# EAGLE board ZephMultiples-R2 (EAGLE 6.5.0)
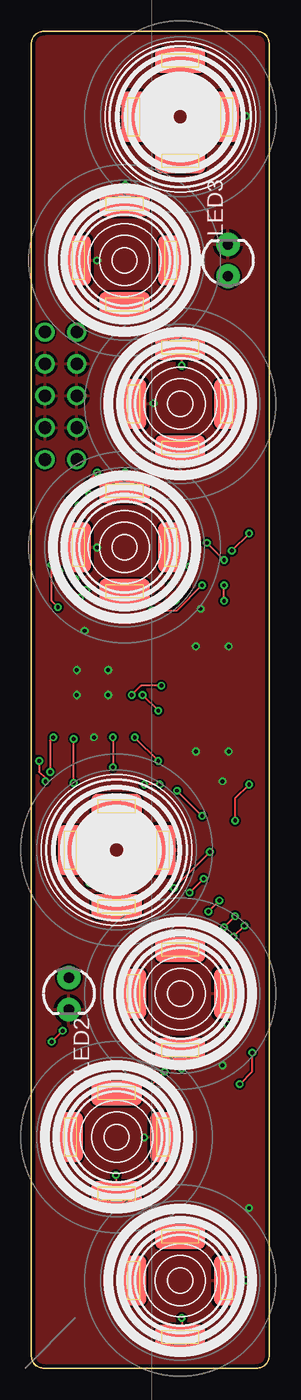
[diagram p0: board, top side]
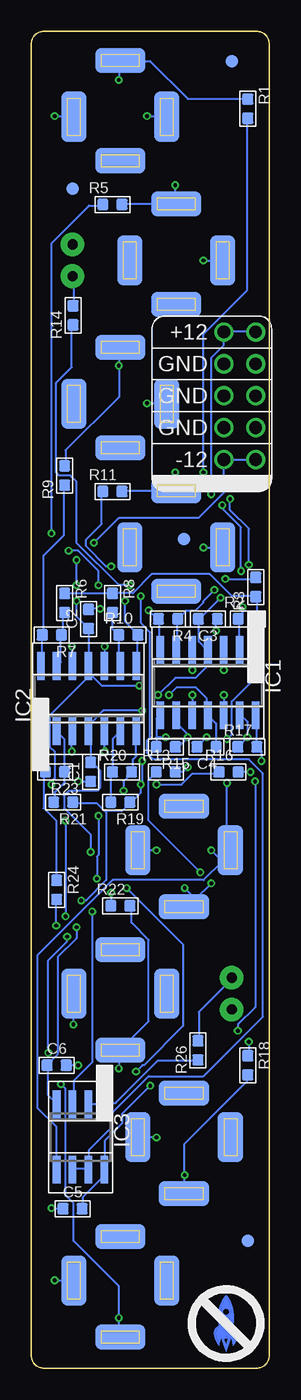
[diagram p1: board, bottom side, seen from below]

Size 18.98 x 106.5 mm. Coordinates in mm from the lower left corner, seen from the top.
Copper layers (1*16): Top 0.035mm / dielectric 1.5mm / Bottom 0.035mm
Design rules "ITEADstudio_DRC": minimum track width 6mil, minimum drill 12mil, track to track 6mil, track to pad 6mil, pad to pad 6mil, via to via 6mil, smd to smd 0mil, copper to edge 10mil, drill to drill 10mil, minimum pad ring 10mil, minimum via ring 6mil, stop-mask expansion 2mil, vias tented up to drill 100mil, thermal gap 10mil
Net classes: 1 AUDIO: width 1.016 mm

## Footprints (pad centres in the part's own frame; a part is rotated, then mirrored left to right if it is on the bottom)
C0603 = smd 0.889 x 0.889: 1 -0.762,0; 2 0.762,0
3.5MM-JACK-SWITCH-13MM-INPUT = smd 2 x 4: RING@1 -3.7,0; SWITCH@1 3.7,0 | smd 2 x 4 bottom: RING@2 -3.7,0; SWITCH@2 3.7,0 | smd 4 x 2: SECOND@1 0,-3.5; TIP@1 0,4.5 | smd 4 x 2 bottom: SECOND@2 0,-3.5; TIP@2 0,4.5
SO14 = smd 0.6 x 2.2: 1 -3.81,-2.6; 2 -2.54,-2.6; 3 -1.27,-2.6; 4 0,-2.6; 5 1.27,-2.6; 6 2.54,-2.6; 7 3.81,-2.6; 8 3.81,2.6; 9 2.54,2.6; 10 1.27,2.6; 11 0,2.6; 12 -1.27,2.6; 13 -2.54,2.6; 14 -3.81,2.6
SO08 = smd 0.6 x 2.2: 1 -1.905,-2.6; 2 -0.635,-2.6; 3 0.635,-2.6; 4 1.905,-2.6; 5 1.905,2.6; 6 0.635,2.6; 7 -0.635,2.6; 8 -1.905,2.6
LED3MM = drill 0.813 pad 1.88: A -1.27,0; K 1.27,0
3.5MM-JACK-SWITCH-13MM-OUTPUT = smd 2 x 4: RING@1 -3.7,0; SWITCH@1 3.7,0 | smd 2 x 4 bottom: RING@2 -3.7,0; SWITCH@2 3.7,0 | smd 4 x 2: SECOND@1 0,-3.5; TIP@1 0,4.5 | smd 4 x 2 bottom: SECOND@2 0,-3.5; TIP@2 0,4.5
R0603 = smd 0.889 x 0.889: 1 -0.762,0; 2 0.762,0
FIDUCIAL_1MM = smd 1 x 1: 1 0,0
POWER_10_LABELSOTHERSIDE = drill 1.016: 1 -5.08,-1.27; 2 -5.08,1.27; 3 -2.54,-1.27; 4 -2.54,1.27; 5 0,-1.27; 6 0,1.27; 7 2.54,-1.27; 8 2.54,1.27; 9 5.08,-1.27; 10 5.08,1.27

## Placement (x,y rotation side)
C1  100n  [C0603]  14.25,47.5 90 bottom
C2  100n  [C0603]  14.42,59.69 90 bottom
C3  100n  [C0603]  4.89,59.69 180 bottom
C4  100n  [C0603]  5,49.5 180 bottom
C5  100n  [C0603]  15.69,12.7 0 bottom
C6  100n  [C0603]  16.96,24.13 0 bottom
I1  In 1  [3.5MM-JACK-SWITCH-13MM-INPUT]  11.88,99.69 0 top
I2  In 2  [3.5MM-JACK-SWITCH-13MM-INPUT]  6.8,41.27 180 top
IC1  TL074D  [SO14]  4.89,54.61 180 bottom
IC2  TL074D  [SO14]  14.42,53.34 0 bottom
IC3  TL072  [SO08]  15.05,18.41 180 bottom
LED2  REDBLUE  [LED3MM]  2.99,29.84 270 top
LED3  REDBLUE  [LED3MM]  15.69,88.27 90 top
O1-1  [3.5MM-JACK-SWITCH-13MM-OUTPUT]  7.44,88.27 0 top
O1-2  [3.5MM-JACK-SWITCH-13MM-OUTPUT]  11.88,76.83 0 top
O1-3  [3.5MM-JACK-SWITCH-13MM-OUTPUT]  7.44,65.41 0 top
O2-1  [3.5MM-JACK-SWITCH-13MM-OUTPUT]  6.8,18.41 180 top
O2-2  [3.5MM-JACK-SWITCH-13MM-OUTPUT]  11.88,29.84 180 top
O2-3  [3.5MM-JACK-SWITCH-13MM-OUTPUT]  11.88,6.99 180 top
R1  100k  [R0603]  1.72,100.33 270 bottom
R2  100k  [R0603]  1.72,59.69 0 bottom
R3  100k  [R0603]  1.09,62.23 90 bottom
R4  100k  [R0603]  8.07,59.69 180 bottom
R5  51  [R0603]  12.52,92.71 0 bottom
R6  100k  [R0603]  16.32,60.96 270 bottom
R7  100k  [R0603]  17.34,58.42 180 bottom
R8  100k  [R0603]  12.52,60.96 270 bottom
R9  51  [R0603]  16.32,71.12 90 bottom
R10  100k  [R0603]  11.24,58.42 0 bottom
R11  51  [R0603]  12.52,69.85 0 bottom
R13  100k  [R0603]  8.25,47.5 0 bottom
R14  1k  [R0603]  15.65,83.88 90 bottom
R15  100k  [R0603]  8.25,49.5 180 bottom
R16  100k  [R0603]  3.25,47.5 0 bottom
R17  100k  [R0603]  1.75,49.5 0 bottom
R18  51  [R0603]  1.72,24.13 270 bottom
R19  100k  [R0603]  11.88,45.09 180 bottom
R20  100k  [R0603]  11.75,47.5 0 bottom
R21  100k  [R0603]  16.44,45.09 180 bottom
R22  51  [R0603]  11.88,36.83 0 bottom
R23  100k  [R0603]  17.09,47.51 180 bottom
R24  51  [R0603]  16.96,38.1 270 bottom
R26  1k  [R0603]  5.69,25.32 90 bottom
U$1  SMALLROCKET  [SMALLROCKET]  3.75,3.25 0 bottom
U$2  FIDUCIAL  [FIDUCIAL_1MM]  1.72,10.16 0 bottom
U$3  FIDUCIAL  [FIDUCIAL_1MM]  15.69,93.98 0 bottom
U$4  FIDUCIAL  [FIDUCIAL_1MM]  6.8,66.04 0 bottom
U$5  FIDUCIAL  [FIDUCIAL_1MM]  2.99,104.14 0 bottom
U$15  EURORACK_PCB4HP  [EURORACK4HPPCB]  -0.5,0 0 top
U$16  POWER_SIMPLE10-OTHERSIDE  [POWER_10_LABELSOTHERSIDE]  2.36,77.47 90 bottom

## Library data of the parts
C1-C6 R1-R11 R13-R24 R26 = OPL
I1 I2 IC1-IC3 O1-1-O1-3 O2-1-O2-3 U$15 U$16 = EurorackModularParts
LED2 LED3 = SparkFun-LED
U$1 = zephod-components
U$2-U$5 = adafruit

## Nets
12V: C1.2 C3.2 C5.2 IC1.4 IC2.4 IC3.8 U$16.9 U$16.10
-12V: C2.1 C4.1 C6.1 IC1.11 IC2.11 IC3.4 U$16.1 U$16.2
GND: C1.1 C2.2 C3.1 C4.2 C5.1 C6.2 I1.RING@1 I1.RING@2 I1.SWITCH@1 I1.SWITCH@2 I2.RING@1 I2.RING@2 IC1.3 IC1.5 IC1.10 IC1.12 IC2.3 IC2.5 IC2.10 IC2.12 LED2.K LED3.K O1-1.RING@1 O1-1.RING@2 O1-2.RING@1 O1-2.RING@2 O1-3.RING@1 O1-3.RING@2 O2-1.RING@1 O2-1.RING@2 O2-2.RING@1 O2-2.RING@2 O2-3.RING@1 O2-3.RING@2 U$16.3 U$16.4 U$16.5 U$16.6 U$16.7 U$16.8
LED2DRIVE: IC3.6 IC3.7 R14.1
LED3DRIVE: IC3.1 IC3.2 R26.1
N$1: I1.TIP@1 I1.TIP@2 R1.1
N$2: IC1.2 R1.2 R2.1
N$3: I2.SWITCH@1 I2.SWITCH@2 IC1.1 IC3.5 R2.2 R3.1 R6.1 R8.1
N$4: IC1.6 R3.2 R4.1
N$5: IC1.7 R4.2 R5.1
N$6: IC2.13 R6.2 R7.1
N$7: IC2.9 R8.2 R10.1
N$8: IC2.14 R7.2 R9.1
N$9: IC2.8 R10.2 R11.1
N$10: LED3.A R14.2
N$11: O1-1.TIP@1 O1-1.TIP@2 R5.2
N$12: O1-2.TIP@1 O1-2.TIP@2 R9.2
N$13: O1-3.TIP@1 O1-3.TIP@2 R11.2
N$14: I2.TIP@1 I2.TIP@2 R13.1
N$15: IC1.9 R13.2 R15.1
N$16: IC1.8 IC3.3 R15.2 R16.1 R19.1 R21.1
N$17: IC1.13 R16.2 R17.1
N$18: IC1.14 R17.2 R18.1
N$19: IC2.6 R19.2 R20.1
N$20: IC2.2 R21.2 R23.1
N$21: IC2.7 R20.2 R22.1
N$22: IC2.1 R23.2 R24.1
N$23: LED2.A R26.2
N$24: O2-1.TIP@1 O2-1.TIP@2 R18.2
N$25: O2-2.TIP@1 O2-2.TIP@2 R22.2
N$26: O2-3.TIP@1 O2-3.TIP@2 R24.2

## Tracks (layer width: path | path; a pad name or v marks a point on that pad's centre or on a via)
12V  (via drill 0.3)
  Top 0.152: v8.88,53.62 v10.12,52.38 | v10.62,23.62 v9.5,22.5 | v14.25,41.12 v11.38,38.25 | v3.75,68.75 v4.62,69.62 | v2.25,63.5 2.25,63 v3.88,61.38
  Bottom 0.152: U$16.9 1.12,82.62 3.5,82.62 U$16.10 3.62,82.5 3.62,81.5 4.62,80.5 v4.62,69.62 | C5.2 14.88,12.75 14.88,13.62 13.25,15.25 13.25,15.75 IC3.8 13.12,15.88 13.12,18.12 11.75,19.5 11.75,20.25 v9.5,22.5 | 5.62,59.62 5.62,57.88 5,57.25 IC1.4 5,57.12 5,55.88 5.88,55 7.5,55 v8.88,53.62 | v10.12,52.38 13.25,52.38 14.38,51.25 14.38,50.75 IC2.4 14.38,50.62 14.25,50.5 14.25,48.38 C1.2 14.12,48.25 13.5,47.62 13.5,46.25 13.75,46 16,46 16.38,45.62 16.38,44.62 14.25,42.5 v14.25,41.12 | v10.62,23.62 10.12,24.12 10,24.12 6.88,27.25 6.88,33.75 v11.38,38.25 | v3.75,68.75 3.75,68.5 2.25,67 v2.25,63.5 | 5.62,59.62 v3.88,61.38 | 5.62,59.62 C3.2
-12V  (via drill 0.3)
  Top 0.152: v8,53.62 8.75,54.38 v10.38,54.38 | v16.25,36 v15.38,35.12 | v16.25,43.62 16.25,45.38 v17.38,46.5 | v15.38,64.38 v14,65.75 | v15.38,61.12 v15.38,62.38
  Bottom 0.152: U$16.1 1.12,72.38 3.5,72.38 U$16.2 3.62,72.38 3.62,69.75 5.62,67.75 12,67.75 v14,65.75 | IC3.4 17,21.12 17.62,21.75 17.62,24.12 C6.1 17.62,24.25 16.88,25 16.88,32.75 15.38,34.25 v15.38,35.12 | C4.1 4.25,51.38 4.88,52 IC1.11 5,52.12 5,53.38 5.88,54.25 7.38,54.25 v8,53.62 | IC2.11 14.38,56 14.38,58.88 C2.1 14.5,59 15.38,59.88 v15.38,61.12 | v10.38,54.38 13.38,54.38 14.25,55.25 | 14.25,55.25 14.38,55.38 14.38,55.88 IC2.11 | v16.25,43.62 v16.25,36 | v17.38,46.5 17.38,46.75 17.12,47 17.12,49.12 17.5,49.5 17.5,52 14.25,55.25 | 14.25,55.25 IC2.11 | v15.38,62.38 v15.38,64.38
GND  (via drill 0.3)
  Bottom 0.152: v5,50.25 C4.2 | v15.25,46.75 C1.1 | v4.25,58.75 4.25,59.62 C3.1 | v13.5,60.5 14.38,60.5 C2.2 | v17.38,12.75 16.5,12.75 C5.1 | v15.25,24.12 16.12,24.12 C6.2 | v3.62,53.62 3.62,52.12 IC1.12 | v13.12,49.12 13.12,50.62 IC2.5 | v3.62,55.62 3.62,57.12 IC1.3 | v6.12,53.62 6.12,52.12 IC1.10 | v6.12,55.62 6.12,57.12 IC1.5 | v15.75,49.12 15.75,50.62 IC2.3 | v13.12,57.5 13.12,56 IC2.10 | v15.75,57.5 15.75,56 IC2.12 | v17.12,7 15.62,7 O2-3.RING@1 | v9,18.38 10.38,18.38 O2-1.RING@1 | v15.62,27.38 15.62,29.75 O2-2.RING@1 | v9,41.25 10.38,41.25 I2.RING@1 | v5.25,65.38 3.75,65.38 O1-3.RING@1 | v9.75,76.88 8.25,76.88 O1-2.RING@1 | v5.25,88.25 3.75,88.25 O1-1.RING@1 | v9.75,99.75 8.25,99.75 I1.RING@1 | v17.12,99.75 15.62,99.75 I1.SWITCH@2
  pour Top: -0.89,107.14 20.2,107.14 19.57,-0.64 -0.89,-0.64
LED2DRIVE  (via drill 0.3)
  Top 0.152: v10.25,61.5 v11.12,62.38
  Bottom 0.152: v11.12,62.38 12,62.38 15.38,65.75 15.38,70.62 15.88,71.12 16.75,71.12 17,71.38 17,78.5 15.75,79.75 15.75,83 R14.1 | v10.25,61.5 10.25,59.38 9.5,58.62 9.5,50.25 9.75,50 9.75,49 9.25,48.5 1.62,48.5 0.5,47.38 0.5,28 5.25,23.25 9.62,23.25 12.5,20.38 12.5,19.25 14.38,17.38 14.38,15.88 IC3.7 14.5,15.88 15.62,15.88 IC3.6
LED3DRIVE
  Bottom 0.152: R26.1 5.75,24.5 8.88,24.5 12.25,21.12 13.12,21.12 IC3.1 13.25,21 14.38,21 IC3.2
N$1  (via drill 0.3)
  Top 0.152: v12,102.62 12,104.12 I1.TIP@2
  Bottom 0.152: R1.1 1.75,101.12 6.5,101.12 9.5,104.12 11.88,104.12 I1.TIP@2 12,104.12 v12,102.62
N$2  (via drill 0.3)
  Top 0.152: v3.12,69.25 v5.25,71.38 | v1.62,64 1.62,61.12 v2.12,60.62
  Bottom 0.152: IC1.2 2.38,57.25 2.38,59.62 R2.1 2.38,59.75 2.12,60 v2.12,60.62 | v5.25,71.38 5.25,82.38 1.75,85.88 1.75,99.5 R1.2 | v3.12,69.25 3.12,68.38 1.62,66.88 v1.62,64
N$3  (via drill 0.3)
  Top 0.152: v4.62,41.25 3.12,41.25 I2.SWITCH@2 | v3.38,46.62 v3.38,50.12
  Bottom 0.152: R6.1 16.25,61.75 12.62,61.75 R8.1 12.5,61.75 10.88,61.75 9.38,63.25 4.75,63.25 3,61.5 1.12,61.5 R3.1 1,61.38 1,59.75 R2.2 1,59.62 1,57.25 IC1.1 1.12,57.12 1.12,55 3,53.12 3,50.5 v3.38,50.12 | 3.75,40.38 3.12,41 3.12,41.25 I2.SWITCH@2 | 3.75,40.38 5.25,38.88 12.5,38.88 18.5,32.88 18.5,20.75 17,19.25 17,15.88 IC3.5 | 3.75,40.38 v4.62,41.25 | 3.75,40.38 I2.SWITCH@2 | v3.38,46.62 3.38,41 I2.SWITCH@2
N$4  (via drill 0.3)
  Top 0.152: v4.38,62 v3.5,62.88
  Bottom 0.152: v3.5,62.88 1.12,62.88 R3.2 | v4.38,62 5.25,61.12 5.25,61 5.88,60.38 6.62,60.38 7.25,59.75 R4.1 7.38,59.62 7.38,57.25 IC1.6
N$5  (via drill 0.3)
  Top 0.152: v16,65.12 v17.38,66.5 | v13.62,62.38 11.62,60.38 v9.62,60.38
  Bottom 0.152: IC1.7 8.75,57.25 8.75,59.62 R4.2 8.88,59.62 v9.62,60.38 | v17.38,66.5 17.38,89.62 14.38,92.62 13.38,92.62 R5.1 | v16,65.12 15.25,65.12 13.62,63.5 v13.62,62.38
N$6
  Bottom 0.152: R6.2 16.38,60.12 16.5,60 16.5,58.5 R7.1 16.62,58.38 16.62,56.25 16.88,56 IC2.13
N$7
  Bottom 0.152: IC2.9 12,56 12,58.38 R10.1 12.12,58.5 12.5,58.88 12.5,60.12 R8.2
N$8
  Bottom 0.152: IC2.14 18.12,56 18.12,58.38 R7.2 18,58.5 18,64.75 16.38,66.38 16.38,70.25 R9.1
N$9  (via drill 0.3)
  Top 0.152: v12.62,63.88 12.62,62.25 v11.5,61.12
  Bottom 0.152: IC2.8 10.5,56 10.5,58.38 R10.2 10.5,58.5 11.5,59.5 v11.5,61.12 | v12.62,63.88 13,63.88 14.62,65.5 14.62,66 13.38,67.25 13.38,69.75 R11.1
N$10
  Bottom 0.152: R14.2 15.62,84.75 15.62,86.88 LED3.A
N$11  (via drill 0.3)
  Top 0.152: v7.5,94.25 7.5,92.88 O1-1.TIP@1
  Bottom 0.152: R5.2 11.75,92.75 7.5,92.75 O1-1.TIP@1 7.5,92.88 v7.5,94.25
N$12  (via drill 0.3)
  Top 0.152: v12,79.88 12,81.25 O1-2.TIP@1
  Bottom 0.152: R9.2 16.25,72 16.25,73.12 12,77.38 v12,79.88 12,81.25 O1-2.TIP@1
N$13  (via drill 0.3)
  Top 0.152: v7.5,71.38 7.5,70 O1-3.TIP@1
  Bottom 0.152: R11.2 11.75,69.88 7.5,69.88 O1-3.TIP@1 7.5,70 v7.5,71.38
N$14  (via drill 0.3)
  Top 0.152: v4.62,38.62 v5.5,39.5 | v6.75,38.25 6.75,36.88 I2.TIP@2
  Bottom 0.152: v5.5,39.5 9.62,43.62 9.62,46.88 9.12,47.38 R13.1 | 5.88,37.38 6.38,36.88 6.75,36.88 I2.TIP@2 5.88,37.38 | 5.88,37.38 v4.62,38.62 | 5.88,37.38 v6.75,38.25
N$15  (via drill 0.3)
  Top 0.152: v6.5,50.25 v6.5,47.88
  Bottom 0.152: v6.5,47.88 6.88,47.5 7.38,47.5 R13.2 | R15.1 7.38,49.38 v6.5,50.25 6.5,50.5 7.38,51.38 7.38,52 IC1.9
N$16  (via drill 0.3)
  Top 0.152: v10.25,46.5 v9,46.5 | v15,37.25 v14.12,36.38 | v10.12,48.38 v8.25,50.25
  Bottom 0.152: 9,50.25 9,51.75 8.75,52 IC1.8 | 9,50.25 R15.2 | v9,46.5 7,46.5 6.12,47.38 4.12,47.38 R16.1 | 13,44.38 11.75,44.38 11.12,45 R19.1 11,45.12 10.25,45.88 v10.25,46.5 10.12,46.62 v10.12,48.38 | 13,44.38 13.12,44.38 13.75,45 15.62,45 R21.1 | v14.12,36.38 14.12,24.38 15.62,22.88 15.62,21.12 IC3.3 | v15,37.25 14.62,37.25 13,38.88 13,44.38 | v8.25,50.25 9,50.25
N$17  (via drill 0.3)
  Top 0.152: v1.5,47.5 1.5,50 v1.75,50.25
  Bottom 0.152: v1.5,47.5 2.38,47.5 R16.2 | R17.1 v1.75,50.25 1.75,51.5 2.25,52 IC1.13
N$18  (via drill 0.3)
  Top 0.152: v2.5,26.88 v1.62,26 | v1.12,46.75 1.12,47 0.62,47.5 v0.62,48.38
  Bottom 0.152: v1.62,26 1.62,25 R18.1 | v2.5,26.88 2.5,27.38 1.12,28.75 v1.12,46.75 | v0.62,48.38 0.62,49.12 0.88,49.38 R17.2 1,52 IC1.14
N$19
  Bottom 0.152: R19.2 12.62,45.12 12.62,47.38 R20.1 12.5,50.12 12,50.62 IC2.6
N$20
  Bottom 0.152: IC2.2 16.88,50.62 16.38,50.12 16.38,47.62 R23.1 16.38,47.5 16.38,46.62 17.12,45.88 17.12,45.12 R21.2
N$21  (via drill 0.3)
  Top 0.152: v13.75,39 v12.62,37.88 | v11.62,46 v13.62,44
  Bottom 0.152: v12.62,37.88 12.62,36.88 R22.1 | v13.75,39 13.75,40.75 13.62,40.88 v13.62,44 | v11.62,46 11.62,46.75 11,47.38 R20.2 10.88,47.5 10.88,48.5 10.62,48.75 10.62,50.62 IC2.7
N$22
  Bottom 0.152: R24.1 17,38.88 17,43.62 18,44.62 18,47.38 17.88,47.5 R23.2 17.88,47.62 18.12,47.88 18.12,50.62 IC2.1
N$23
  Bottom 0.152: R26.2 5.62,26.12 5.62,28.38 3,31 LED2.A
N$24  (via drill 0.3)
  Top 0.152: v6.75,15.38 6.75,14 O2-1.TIP@1
  Bottom 0.152: R18.2 1.75,23.25 1.75,22.88 6.75,17.88 v6.75,15.38 6.75,14 O2-1.TIP@1
N$25  (via drill 0.3)
  Top 0.152: v12,23.88 12,25.25 O2-2.TIP@1
  Bottom 0.152: R22.2 11,36.75 11,35.5 9.62,34.12 9.62,27.62 11.88,25.38 O2-2.TIP@1 12,25.25 v12,23.88
N$26  (via drill 0.3)
  Top 0.152: v16.12,34.38 v17,35.25 | v17.62,25.12 17.62,23.62 v16.62,22.62 | v12,4 12,2.5 O2-3.TIP@1
  Bottom 0.152: v17,35.25 17,37.25 R24.2 | v16.12,34.38 16.12,34 17.62,32.5 v17.62,25.12 | v16.62,22.62 16.25,22.25 16.25,13.75 15.62,13.12 15.62,10.12 12,6.5 v12,4 12,2.5 O2-3.TIP@1